# Allegro board EXAMDCCIRCUIT.brd
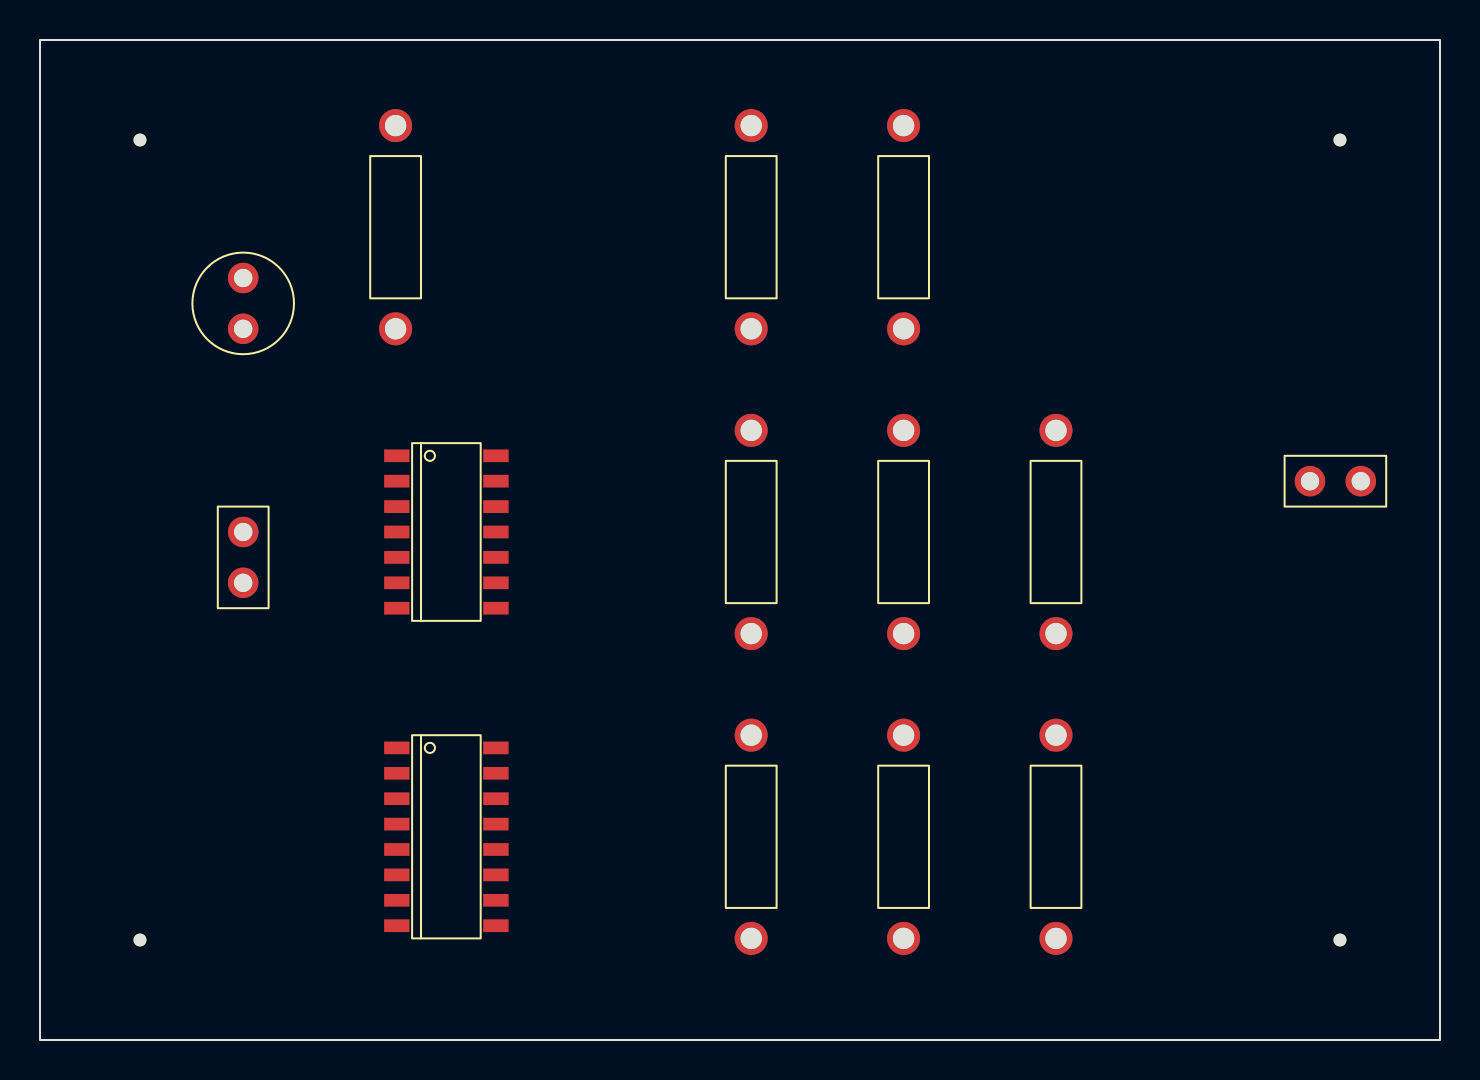
[diagram p0: board, top side]
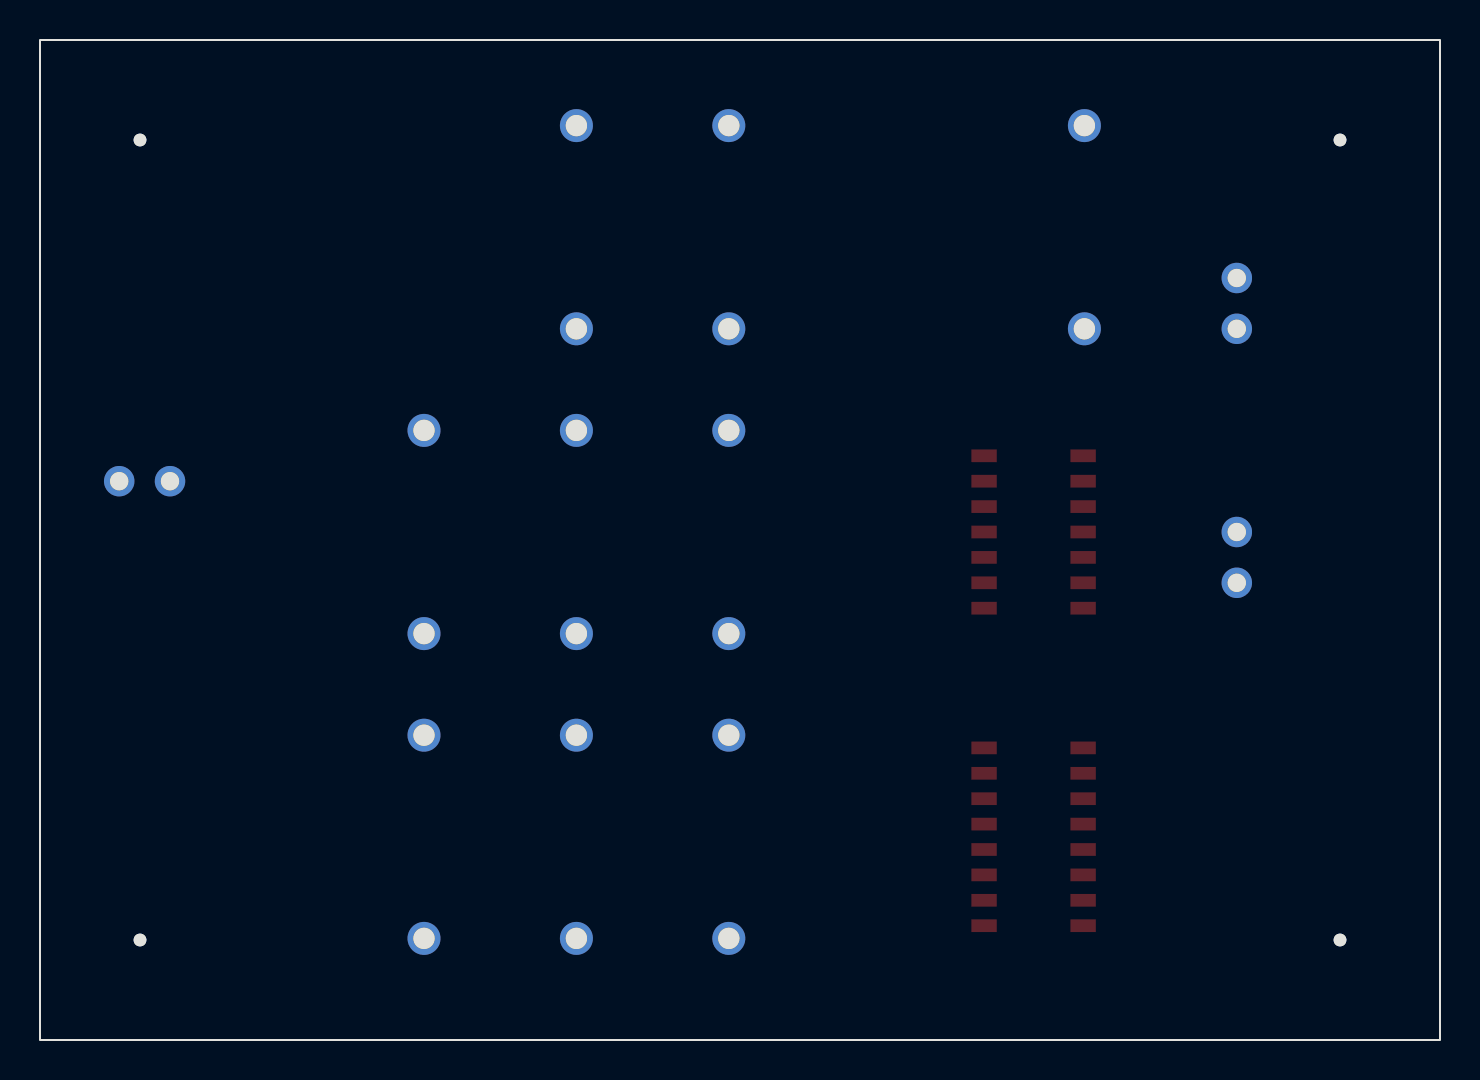
[diagram p1: board, bottom side, seen from below]

Outline 70 x 50 mm; copper layers: TOP, BOTTOM. Coordinates in mm from the lower left corner of the outline.
Outline path: rectangle 0,0 70,50

## Design rules (mm)
nets with their own width: min track width 0.5; nets GND VCC

## Placement (name value [footprint] x y rotation side)
C1  10u  [CAP196]  10.16 35.56 0 top
J1  CON2  [JUMPER2]  63.5 27.94 0 top
J2  CON2  [JUMPER2]  10.16 25.4 270 top
NOREF  -  [unnamed]  5 45 0 top
NOREF#2  -  [unnamed]  65 45 0 top
NOREF#3  -  [unnamed]  5 5 0 top
NOREF#4  -  [unnamed]  65 5 0 top
R1  20k  [RES400]  35.56 35.56 0 top
R2  50k  [RES400]  17.78 35.56 0 top
R3  10k  [RES400]  43.18 35.56 0 top
R4  20k  [RES400]  35.56 20.32 0 top
R5  10k  [RES400]  43.18 20.32 0 top
R6  20k  [RES400]  35.56 5.08 0 top
R7  10k  [RES400]  43.18 5.08 0 top
R8  20k  [RES400]  50.8 5.08 0 top
R9  20k  [RES400]  50.8 20.32 0 top
U1  7414  [SOIC14]  20.32 25.4 0 top
U2  4520  [SOIC16]  20.32 10.16 0 top

## Library data of the parts
C1 = C: Tolerance: ***; User Part Number: ***
J1 J2 = CON2: User Part Number: ***
R1-R9 = R: Tolerance: ***; User Part Number: ***
U1 = 7414: Tolerance: ***; User Part Number: ***
U2 = 4520_0: Tolerance: ***; User Part Number: ***

## Footprints (pads in the part's own frame, mm; a bottom-side part is the same pattern mirrored in y, then rotated)
CAP196
  round 1.524 hole 0.914: 1(0,0) 2(0,2.54)
JUMPER2
  round 1.524 hole 0.914: 1(0,0) 2(2.54,0)
RES400
  round 1.651 hole 1.067: 1(0,0) 2(0,10.16)
SOIC14
  rect 1.27x0.635 smd: 1(-2.477,3.81) 2(-2.477,2.54) 3(-2.477,1.27) 4(-2.477,0) 5(-2.477,-1.27) 6(-2.477,-2.54) 7(-2.477,-3.81) 8(2.477,-3.81) 9(2.477,-2.54) 10(2.477,-1.27) 11(2.477,0) 12(2.477,1.27) 13(2.477,2.54) 14(2.477,3.81)
SOIC16
  rect 1.27x0.635 smd: 1(-2.477,4.445) 2(-2.477,3.175) 3(-2.477,1.905) 4(-2.477,0.635) 5(-2.477,-0.635) 6(-2.477,-1.905) 7(-2.477,-3.175) 8(-2.477,-4.445) 9(2.477,-4.445) 10(2.477,-3.175) 11(2.477,-1.905) 12(2.477,-0.635) 13(2.477,0.635) 14(2.477,1.905) 15(2.477,3.175) 16(2.477,4.445)
unnamed
  round 0.635 hole 3.175 unplated: (0,0)

## Nets
GND: C1.2 J1.1 J2.1 R9.1 U1.7 U2.7(RST) U2.8(GND)
VCC: J2.2 U1.14 U2.2(CKE) U2.16(VCC)
N00525: C1.1 R2.1 U1.1(A)
N00539: R2.2 U1.2(Y) U1.3(A)
N00623: U1.4(Y) U2.1(CLK)
N00834: R1.1 U2.6(Q3)
N00846: R1.2 R3.2
N00853: R3.1 R4.2 R5.2
N00857: R5.1 R6.2 R7.2
N00861: R7.1 R8.2 R9.2
N00896: R4.1 U2.5(Q2)
N00928: R6.1 U2.4(Q1)
N00940: R8.1 U2.3(Q0)
N01126: J1.2

Pads without a net: U1 5 6 8 9 10 11 12 13; U2 9 10 11 12 13 14 15
